# Altium PCB DCCController.PcbDoc
Units mil, origin at the board's own origin, x right, y up, seen from the top; angles counter-clockwise.
Board outline 6000 x 4000 mil, 2 copper layers (Top Layer, Bottom Layer); 53 components, 75 nets, 242 pads, 18 vias.
Unrouted connection lines stored in the file: 1.
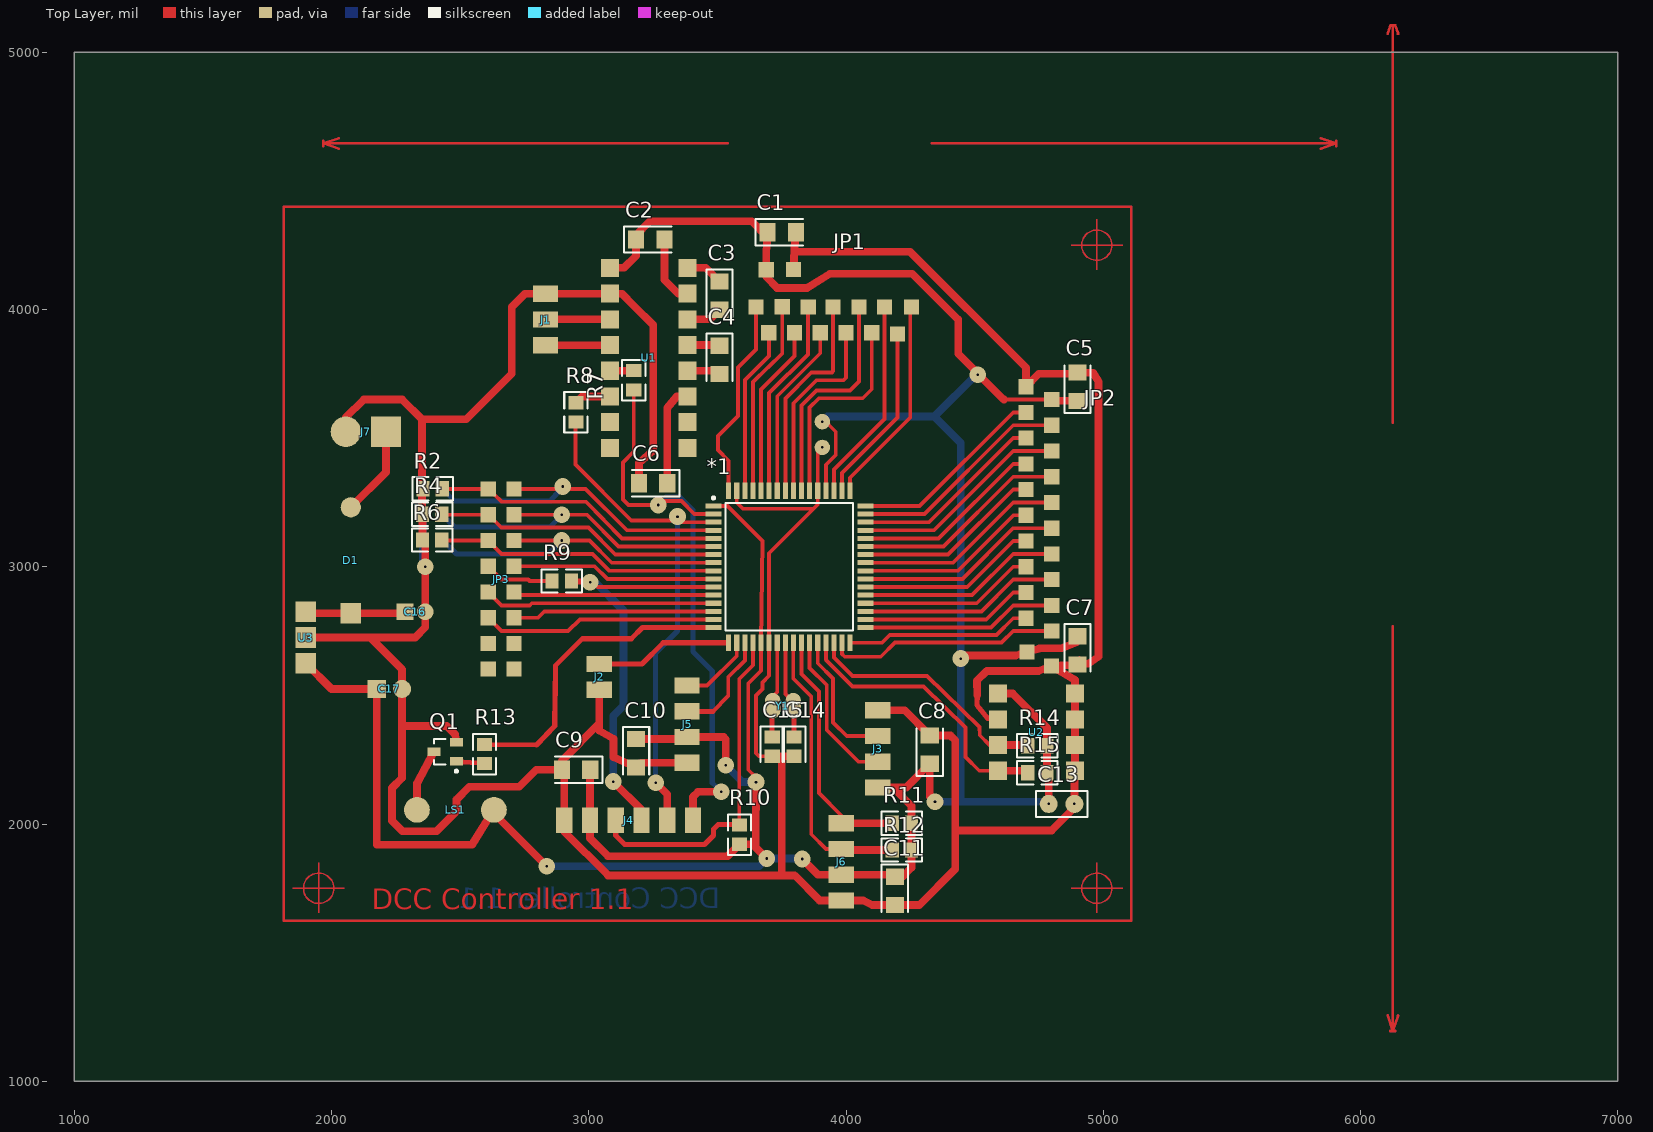
[diagram p0: Top Layer view]
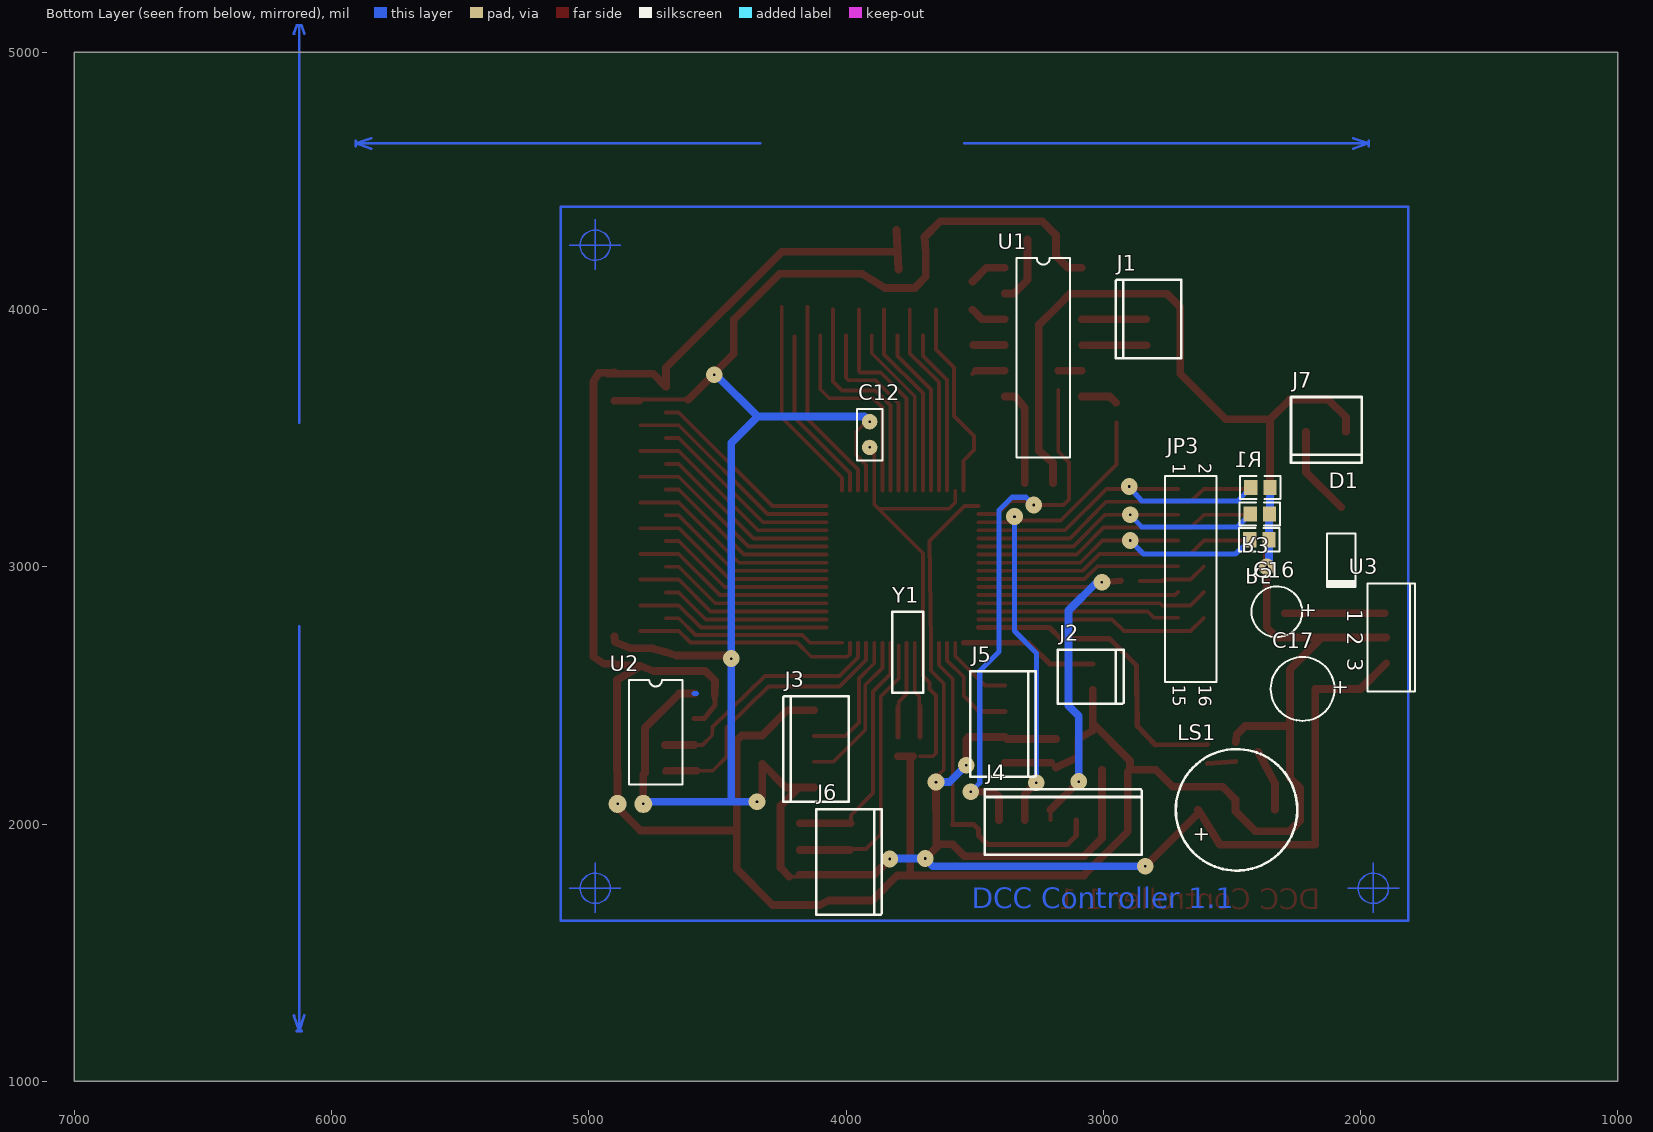
[diagram p1: Bottom Layer view, seen from below]

## Layer stack, top to bottom
Top Layer: signal copper 1.4
Dielectric: dielectric 12.6, FR-4, Dk 4.8
Bottom Layer: signal copper 1.4

## Board outline
1000,1000 7000,1000 7000,5000 1000,5000

## Design rules (kind name [scope] priority, off if disabled: settings)
Clearance [All] p1: gap=10
ComponentClearance [All] p1: gap=10 collisioncheckmode=0
PolygonConnect [All] p1: connectstyle=Relief reliefconductorwidth=10 reliefentries=4 polygonreliefangle="90 Angle"
RoutingLayers [All] p1: top layer=Horizontal bottom layer=Vertical
RoutingVias [All] p1: holewidth=28 width=50 viastyle="Through Hole" minholewidth=28 minwidth=50 maxholewidth=28 maxwidth=50
SolderMaskExpansion [All] p1: expansion=4
TestPointUsage [All] p1: valid=0 allowmultiple=FALSE
Testpoint [All] p1: side=15 testpointundercomponent=TRUE minsize=40 maxsize=100 preferedsize=60 minholesize=0 maxholesize=40 preferedholesize=32 testpointgrid=1 style=1023 order=-539222988
Width [All] p1: maxlimit=50 minlimit=10 preferedwidth=20 toplayer_prefwidth=30 bottomlayer_prefwidth=30 minimp=50.000000 maximp=50.000000 favimp=50.000000
16 further rules are at their usual default settings.

## Classes and differential pairs
component class DCCController: *1 C1 C2 C3 C4 C5 C6 C7 C8 C9 C10 C11 C12 C13 C14 C15 C16 C17 D1 J1 J2 J3 J4 J5 J6 J7 JP1 JP2 JP3 LS1 Q1 R1 R2 R3 R4 R5 R6 R7 R8 R9 R10 R11 R12 R13 R14 R15 U1 U2 U3 Y1

## Components (designator, comment, footprint, x,y, rotation, side; value= is the part's Value field where it differs from the comment)
*1 "Atmega128" 64A 3780,3000 r0 top
C1 "Cap Pol1" CC3216-1206 3750,4300 r0 top
C2 "Cap Pol1" CC3216-1206 3239,4272 r0 top
C3 "Cap Pol1" CC3216-1206 3508,4054 r270 top
C4 "Cap Pol1" CC3216-1206 3508,3804 r270 top
C5 "Cap Pol1" CC3216-1206 4900,3700 r90 top
C6 "Cap Pol1" CC3216-1206 3250,3325 r180 top
C7 "Cap Pol1" CC3216-1206 4900,2675 r270 top
C8 "Cap Pol1" CC3216-1206 4326,2289 r90 top
C9 "Cap Pol1" CC3216-1206 2951,2211 r180 top
C10 "Cap Pol1" CC3216-1206 3184,2275 r270 top
C11 "Cap Pol1" CC3216-1206 4190,1740 r270 top
C12 "Cap" RAD-0.1#1 3908,3514 r270 bottom
C13 "Cap" RAD-0.1#2 4838,2078 r0 top
C14 "Cap" CC2012-0805 3798,2301 r270 top
C15 "Cap" CC2012-0805 3713,2301 r270 top
C16 "Cap Pol1" CAPPR2-5X11 2325,2825 r0 bottom
C17 "Cap Pol1" CAPPR2.5-6.3X11.5 2225,2525 r0 bottom
D1 "Diode 1N4001" DIO10.46-5.3x2.8 2075,3025 r270 bottom
J1 "RS232" "0.1 SIP 3 PIN" 2732,3861 r180 bottom
J2 "DCCOut" "0.1 SIP 2 PIN" 3141,2722 r0 bottom
J3 "LCD" "0.1 SIP 4 PIN" 4024,2242 r180 bottom
J4 "ISP" "0.1 SIP 6 PIN" 3105,1915 r270 bottom
J5 "Throttle Quadrature" "0.1 SIP 4 PIN" 3482,2438 r0 bottom
J6 "External CABs" "0.1 SIP 4 PIN" 4081,1903 r0 bottom
J7 "SIP2 CONNECTOR" "0.156 SIP 2 PIN" 1900,3625 r90 bottom
JP1 "Header 15" HDR1X15 3565,4700 r0 top
JP2 "Header 22" HDR1X22 5860,4200 r270 top
JP3 "Keypad" HDR2X8 2709,3302 r270 bottom
LS1 "Buzzer" "Mini PC Mount Piezo" 2631.21,2055 r180 bottom
Q1 "" SO-G3 2442,2281 r90 top
R1 "Res2" CR2012-0805 2389,3308 r180 bottom
R2 "Res2" CR2012-0805 2393,3303 r180 top
R3 "Res2" CR2012-0805 2391,3205 r180 bottom
R4 "Res2" CR2012-0805 2391,3204 r180 top
R5 "Res2" CR2012-0805 2393,3105 r180 bottom
R6 "Res2" CR2012-0805 2391,3104 r180 top
R7 "Res2" CR2012-0805 3175,3725 r270 top
R8 "Res2" CR2012-0805 2950,3600 r270 top
R9 "Res2" CR2012-0805 2895,2945 r0 top
R10 "Res2" CR2012-0805 3586,1959 r90 top
R11 "Res2" CR2012-0805 4217,2003 r0 top
R12 "Res2" CR2012-0805 4217,1899 r0 top
R13 "Res1" R2012-0805 2595,2272 r270 top
R14 "Res2" CR2012-0805 4744,2304 r180 top
R15 "Res2" CR2012-0805 4744,2199 r180 top
U1 "MAX232ACPE" PE16A 3233,3812 r270 bottom
U2 "24LC256" 8P3 4740,2357 r270 bottom
U3 "LM7805CT" T03B 1900,2725 r270 bottom
Y1 "XTAL" "Xtal Cylinder" 3760,2460 r180 bottom
? "" Crosshair 4975,4250 r270 top
? "" Crosshair 4975,1750 r270 top
? "" Crosshair 1950,1750 r270 top

## Footprints (in the part's own frame and the unit in brackets; to place one, negate y for a bottom-side part, rotate by r counter-clockwise, add the part's x,y. Pads: shape width x height; smd on the part's side, far side on the other; paste and mask are expansions set on the pad)
"0.1 SIP 2 PIN" [mm] "0.1 SIP 2 PIN"
  rect 2.5x1.6 smd far side: 1(-2.54,5.08) 2(-2.54,2.54)
  silkscreen extent -5.59,1.14 0.89,6.48
"0.1 SIP 3 PIN" [mm] "0.1 SIP 3 PIN"
  rect 2.5x1.6 smd far side: 1(-2.54,5.08) 2(-2.54,2.54) 3(-2.54,0)
  silkscreen extent -5.59,-1.27 0.89,6.48
"0.1 SIP 4 PIN" [mm] "0.1 SIP 4 PIN"
  rect 2.5x1.6 smd far side: 1(-2.54,5.08) 2(-2.54,2.54) 3(-2.54,0) 4(-2.54,-2.54)
  silkscreen extent -5.59,-3.94 0.89,6.48
"0.1 SIP 6 PIN" [mm] "0.1 SIP 6 PIN"
  rect 2.5x1.6 smd far side: 1(-2.54,5.08) 2(-2.54,2.54) 3(-2.54,0) 4(-2.54,-2.54) 5(-2.54,-5.08) 6(-2.54,-7.62)
  silkscreen extent -5.59,-9.02 0.89,6.48
"0.156 SIP 2 PIN" [mm]
  rect 3x3 smd far side: 1(-2.54,7.92)
  round 3 smd far side: 2(-2.54,3.96)
  silkscreen extent -5.59,2.41 0.89,9.4
8P3 [mil] "DIP; 8 Leads; Row Spacing 7.62 mm; Pitch 2.54 mm"
  rect 70x70 smd far side: 1(-150,-150) 2(-50,-150) 3(50,-150) 4(150,-150) 5(150,150) 6(50,150) 7(-50,150) 8(-150,150)
  silkscreen extent -203,-104 203,104
64A [mm] "QFP; 64 Leads; Body 14 x 14 mm; Pitch 0.8 mm"
  rect 1.6x0.5 smd: 1(-7.5,6) 2(-7.5,5.2) 3(-7.5,4.4) 4(-7.5,3.6) 5(-7.5,2.8) 6(-7.5,2) 7(-7.5,1.2) 8(-7.5,0.4) 9(-7.5,-0.4) 10(-7.5,-1.2) 11(-7.5,-2) 12(-7.5,-2.8) 13(-7.5,-3.6) 14(-7.5,-4.4) 15(-7.5,-5.2) 16(-7.5,-6) 33(7.5,-6) 34(7.5,-5.2) 35(7.5,-4.4) 36(7.5,-3.6) 37(7.5,-2.8) 38(7.5,-2) 39(7.5,-1.2) 40(7.5,-0.4) 41(7.5,0.4) 42(7.5,1.2) 43(7.5,2) 44(7.5,2.8) 45(7.5,3.6) 46(7.5,4.4) 47(7.5,5.2) 48(7.5,6)
  rect 0.5x1.6 smd: 17(-6,-7.5) 18(-5.2,-7.5) 19(-4.4,-7.5) 20(-3.6,-7.5) 21(-2.8,-7.5) 22(-2,-7.5) 23(-1.2,-7.5) 24(-0.4,-7.5) 25(0.4,-7.5) 26(1.2,-7.5) 27(2,-7.5) 28(2.8,-7.5) 29(3.6,-7.5) 30(4.4,-7.5) 31(5.2,-7.5) 32(6,-7.5) 49(6,7.5) 50(5.2,7.5) 51(4.4,7.5) 52(3.6,7.5) 53(2.8,7.5) 54(2,7.5) 55(1.2,7.5) 56(0.4,7.5) 57(-0.4,7.5) 58(-1.2,7.5) 59(-2,7.5) 60(-2.8,7.5) 61(-3.6,7.5) 62(-4.4,7.5) 63(-5.2,7.5) 64(-6,7.5)
  silkscreen extent -7.62,-6.3 6.3,6.92
CAPPR2-5X11 [mil]
  rect 65x65 smd far side: 1(-39.37,0)
  round 65 smd far side: 2(39.37,0)
  silkscreen extent -98,-98 98,98
CAPPR2.5-6.3X11.5 [mil]
  rect 70x70 smd far side: 1(-49.21,0)
  round 70 smd far side: 2(49.21,0)
  silkscreen extent -124,-124 124,124
CC2012-0805 [mm]
  rect 1.3x1.5 smd: 1(-0.95,0) 2(0.95,0)
  silkscreen extent -2,-1.15 1.5,1.15
CC3216-1206 [mm]
  rect 1.6x1.8 smd: 1(-1.4,0) 2(1.4,0)
  silkscreen extent -2.6,-1.3 2.1,1.3
CR2012-0805 [mm]
  rect 1.3x1.5 smd: 1(-0.95,0) 2(0.95,0)
  silkscreen extent -2,-1.15 2,1.15
Crosshair [mil] "Mounting Hole pad"
  Multi-Layer circle w5: c0,0 r59.06
  Multi-Layer lines w5: 0,-100 0,100 ; 95,0 -100,0
DIO10.46-5.3x2.8 [mm]
  round 2 smd far side: 1(-5.23,0)
  rect 2x2 smd far side: 2(5.23,0)
  silkscreen extent -2.65,-1.4 2.75,1.4
HDR1X15 [mil] "Connector; Header; 15 Position"
  rect 59.06x59.06 smd: 1(231,-544) 2(125,-545) 3(85,-690) 4(135,-790) 5(187,-689) 6(235,-790) 7(288,-690) 8(335,-790) 9(385,-690) 10(435,-790) 11(485,-690) 12(535,-790) 13(585,-690) 14(635,-795) 15(690,-690)
HDR1X22 [mil] "Connector; Header; 22 Position"
  rect 59.06x59.06 smd: 1(500,-1160) 2(550,-1060) 3(600,-1160) 4(650,-1060) 5(700,-1160) 6(750,-1060) 7(800,-1160) 8(850,-1060) 9(900,-1160) 10(950,-1060) 11(1000,-1160) 12(1050,-1060) 13(1100,-1160) 14(1150,-1060) 15(1200,-1160) 16(1250,-1060) 17(1300,-1160) 18(1350,-1060) 19(1400,-1160) 20(1450,-1060) 21(1531,-1156) 22(1586,-1061)
HDR2X8 [mm] "Connector; Header; 8x2 Position"
  rect 1.5x1.5 smd far side: 1(0,0) 2(0,2.54) 3(2.54,0) 4(2.54,2.54) 5(5.08,0) 6(5.08,2.54) 7(7.62,0) 8(7.62,2.54) 9(10.16,0) 10(10.16,2.54) 11(12.7,0) 12(12.7,2.54) 13(15.24,0) 14(15.24,2.54) 15(17.78,0) 16(17.78,2.54)
  silkscreen extent -1.27,-1.27 19.05,3.81
"Mini PC Mount Piezo" [mil]
  round 100 smd far side: 1(0,0) 2(299.21,0)
  silkscreen extent -87,-236 386,236
PE16A [mil] "DIP; 16 Leads; Row Spacing 7.62 mm; Pitch 2.54 mm"
  rect 70x70 smd far side: 1(-350,-150) 2(-250,-150) 3(-150,-150) 4(-50,-150) 5(50,-150) 6(150,-150) 7(250,-150) 8(350,-150) 9(350,150) 10(250,150) 11(150,150) 12(50,150) 13(-50,150) 14(-150,150) 15(-250,150) 16(-350,150)
  silkscreen extent -388,-104 388,104
R2012-0805 [mm]
  rect 1.3x1.5 smd: 1(-0.95,0) 2(0.95,0)
  silkscreen extent -2,-1.15 2,1.15
RAD-0.1#1 [mil]
  round 60 hole 10: 1(-50,0) 2(50,0)
  silkscreen extent -100,-50 100,50
RAD-0.1#2 [mil]
  round 70 hole 10: 1(-50,0) 2(50,0)
  silkscreen extent -100,-50 100,50
SO-G3 [mm]
  rect 0.85x1.3 smd: 1(-0.95,-1.1) 2(0.95,-1.1) 3(0,1.1)
  silkscreen extent -2.05,-1.22 1.28,1.1
T03B [mil] "TO, Thru-Hole, Vertical, Heatsink Mounted; 3 In-Line Leads; Pitch 2.54 mm"
  rect 80x80 smd far side: 1(-100,0) 2(0,0) 3(100,0)
  silkscreen extent -211,-73 211,112
"Xtal Cylinder" [mil]
  oval 60x99.37 smd far side: 1(-35,0) 2(45,0)
  silkscreen extent -60,50 60,365

## Part data
C1 C2 C3 C4 C5 C6 C7 C8 C9 C10 C11 C16 C17: "Polarized Capacitor (Radial)"
C12 C13 C14 C15: "Capacitor"
D1: "1 Amp General Purpose Rectifier"
J1: library part "SIP3 CONNECTOR"
J2: library part "SIP2 CONNECTOR"
J3 J5 J6: library part "SIP4 CONNECTOR"
J4: library part "SIP6 CONNECTOR"
JP1: "Header, 15-Pin"
JP2: "Header, 22-Pin"
JP3: library part "Header 8X2", "Header, 8-Pin, Dual row"
LS1: "Magnetic Transducer Buzzer"
Q1: library part MMBT100A, "General Purpose Amplifier NPN Silicon"
R1 R2 R3 R4 R5 R6 R7 R8 R9 R10 R11 R12 R13 R14 R15: "Resistor"
U1: "+5V Powered, Multi-Channel RS-232 Driver/Receiver"
U3: "Series 3-Terminal Positive Regulator"
Y1: "Crystal Oscillator"

## Via types
v1: diameter 65, hole 10, Top Layer to Bottom Layer, 18 vias

## Nets (pads, with @x,y where several pads share a name; then routed paths per layer and width w, separated by ;. In a path a pad name is that pad's centre, name@x,y a point inside that pad or via, vN(x,y) a via of type N, cw(c..) or ccw(c..) an arc to the next point about the centre after c; other vN are vias at no path point)
GND: *1.22 *1.53 *1.63 C1.2 C5.2 C6.2 C7.2 C8.2 C9.2 C10.2 C11.2 C12.2 C13.2 C14.2 C15.2 C16.2 C17.2 J1.1 J2.1 J3.1 J4.1 J5.1 J6.1 J7.2 JP1.1 JP2.1 JP2.22 Q1.2 R1.2 R2.2 R3.2 R4.2 R5.2 R6.2 U1.15 U2.1 U2.2 U2.3 U2.4 U2.7 U3.2 | length 16317.3
  Top Layer w15: R6.2 R6.2@2364.37,3093.23 ; C9.2 C9.2@2905,2201.88 ; U1.15@3082,4061 U1.15 ; C10.2 C10.2@3202.12,2238 ; *1.63 3575.28,3250.28 3600,3225.55 3874.45,3225.55 ; C15.2 3661.4,2263.6 3650,2275 3650,2500 3675,2525 3675,2550 3701.26,2576.26 3701.26,3052.36 3890.24,3241.34 3890.24,3460.24 C12.2@3905,3475 ; C15.2@3738.6,2263.6 3750,2263.6 ; C1.2@3804,4309 3805.12,4225 ; U2.7 U2.7@4590,2410 ; U2.4@4888,2205 U2.4 ; C7.2 C7.2@4907,2645.88
  Top Layer w20: 4510,2501 4509,2462 4551,2410 U2.7@4590,2410
  Top Layer w30: U3.2 2325,2725 2364.37,2764.37 R6.2@2364.37,3093.23 ; J7.2 2055.91,3580.91 2125,3650 2275,3650 2351.6,3573.4 ; 2150,2725 2274.21,2600.79 2274.21,2179.21 2235,2140 2235,2013 2276,1972 2408,1972 2486,2050 2486,2095 2536,2145 2730,2145 2796,2211 C9.2 2895.88,2245.88 3041,2391 ; 2274.21,2381 2448,2381 2481,2348 Q1.2 ; R4.2@2351.6,3206 2351.6,3573.4 ; R6.2 R4.2 ; C9.2@2905,2201.88 2905,1970 3075,1800 3800,1800 3897,1703 J6.1 4067,1703 4102,1685 C11.2 4284.88,1684.88 4425,1825 4425,2325 4405.88,2344.12 C8.2 4228.12,2442 J3.1 ; J2.1 3041,2362.88 3096,2331 3096,2260 C10.2 ; C6.2 3195,3404 3251,3452 3251,3940 3174.88,4015.12 3129,4061 J1.1 2752,4061 2701,4010 2701,3751 2523.4,3573.4 2351.6,3573.4 ; C10.2@3202.12,2238 J5.1 ; C15.2@3738.6,2263.6 C14.2 ; 3750,1800 3750,2263.6 ; JP1.1 C1.2@3804,4309 ; 3805.12,4225 4249,4225 4700,3774 JP2.1 4750,3750 C5.2@4925,3750 ; 4425,1975 4800,1975 4888,2063 U2.4@4888,2205 ; 4510,2501 4509,2557 4548,2595 4748,2595 JP2.22 ; U2.4 4890,2560 JP2.22 ; C7.2 JP2.22 ; C5.2 4960,3754 4982,3719 4982,2651 4941.88,2622.88 C7.2@4901,2622.88
  Bottom Layer w20: v1@2355.6,3008.77 v1(2364.37,3000)
  Bottom Layer w30: R3.2@2351.6,3207 R1.2 ; v1@2355.6,3008.77 R3.2@2355.6,3203
Net*1_2: *1.2 J4.6 R7.2 | length 2347.9
  Top Layer w15: R7.2 3175,3448 3133,3406 3133,3262 3155,3240 v1(3270,3240) 3285,3255 3360,3255 3410.28,3204.72 *1.2
  Top Layer w30: J4.6 3405,2105 3425,2125 v1(3515,2125)
  Bottom Layer w20: v1(3270,3240) 3300,3270 3355,3270 3405,3220 3405,2670 3480,2595 3480,2160 v1(3515,2125)
Net*1_3: *1.3 J4.5 R8.2 | length 2039
  Top Layer w15: R8.2@2948,3560.6 2948,3398 3165,3180 3330,3180 v1(3345,3195) 3366.77,3173.23 *1.3
  Top Layer w30: v1(3260,2160) 3305,2115 J4.5
  Bottom Layer w20: v1(3260,2160) 3260,2665 3345,2750 v1(3345,3195)
Net*1_4: *1.4 JP3.1 R1.1 | length 1362.8
  Top Layer w15: JP3.1 2988,3302 3148.27,3141.73 *1.4
  Bottom Layer w20: R1.1 2479.4,3255 2850,3255 v1(2899,3312)
Net*1_5: *1.5 JP3.2 R2.1 | length 1132.8
  Top Layer w15: R2.1@2431.4,3302 JP3.2 2661,3253 2990,3253 3129.76,3110.24 *1.5
Net*1_6: *1.6 JP3.3 R3.1 | length 1334.2
  Top Layer w15: JP3.3 2993,3202 3116.26,3078.74 *1.6
  Bottom Layer w20: R3.1 2478.4,3155 2850,3155 v1(2895,3202)
Net*1_7: *1.7 JP3.4 R4.1 | length 1118.4
  Top Layer w15: R4.1@2430.4,3202 JP3.4 2660,3152 2999,3152 3102.76,3047.24 *1.7
Net*1_8: *1.8 JP3.5 R5.1 | length 1320.4
  Top Layer w15: JP3.5 3003,3102 3089.25,3015.75 *1.8
  Bottom Layer w20: R5.1 2485.4,3050 2843,3050 v1(2895,3102)
Net*1_9: *1.9 JP3.6 R6.1 | length 1103.1
  Top Layer w15: R6.1@2430.4,3102 JP3.6 2661,3050 3015,3050 3080.75,2984.25 *1.9
Net*1_10: *1.10 JP3.7 | length 796.1
  Top Layer w15: JP3.7 3023,3002 3072.24,2952.76 *1.10
Net*1_11: *1.11 J4.4 R9.2 | length 1617.6
  Top Layer w15: v1@3000,2945 v1(3005,2940) 3036,2921 *1.11 ; J4.4 J4.4@3205,2055
  Top Layer w25: R9.2 v1(3005,2940)
  Top Layer w30: v1(3095,2165) J4.4@3205,2055
  Bottom Layer w20: v1(3005,2940) v1@3025,2940
  Bottom Layer w30: v1@3025,2940 3135,2830 3135,2460 3095,2420 v1(3095,2165)
Net*1_12: *1.12 JP3.9 | length 780.8
  Top Layer w15: JP3.9 2721.24,2889.76 *1.12
Net*1_13: *1.13 JP3.10 | length 900.7
  Top Layer w15: JP3.10 2661,2850 2770,2850 2778.27,2858.27 *1.13
Net*1_14: *1.14 JP3.11 | length 786
  Top Layer w15: JP3.11 2802,2802 2826.77,2826.77 *1.14
Net*1_15: *1.15 JP3.12 | length 916
  Top Layer w15: JP3.12 2661,2750 2920,2750 2965.28,2795.28 *1.15
Net*1_16: *1.16 R13.1 | length 1214.9
  Top Layer w20: R13.1 2797,2307 2868,2381 2870,2615 2975,2720 3165,2720 3208.78,2763.78 *1.16
Net*1_17: *1.17 J2.2 | length 537
  Top Layer w20: J2.2 3207,2622 3289.72,2704.72 *1.17
Net*1_18: *1.18 J5.4 | length 292.5
  Top Layer w15: J5.4 3460,2538 3575.28,2653.28 *1.18
Net*1_19: *1.19 J5.3 | length 419
  Top Layer w15: 3483,2438 3542,2497 3542,2570.46 3606.77,2635.23 *1.19
  Top Layer w20: J5.3 3483,2438
Net*1_20: *1.20 J4.3 R10.2 | length 1330.6
  Top Layer w15: R10.2@3585,1997.4 3585,2480 3585,2564 3638.27,2617.27 *1.20
  Top Layer w20: J4.3 3105,1955 3140,1920 3450,1920 3485,1955 3485,1980 3502.4,1997.4 R10.2@3585,1997.4
Net*1_23: *1.23 C15.1 Y1.2 | length 371.7
  Top Layer w15: Y1.2 3715,2495 3732.76,2512.76 *1.23
  Top Layer w20: C15.1 Y1.2@3713,2458
Net*1_24: *1.24 C14.1 Y1.1 | length 376.1
  Top Layer w15: *1.24 3764.25,2505.75 3795,2475 Y1.1
  Top Layer w20: C14.1 Y1.1@3798,2457
Net*1_25: *1.25 J6.3 R12.1 | length 1098.2
  Top Layer w15: *1.25@3795,2695 3795,2565 3865,2495 3865,1960 3922,1903 J6.3
  Top Layer w30: J6.3@3985,1899 R12.1
Net*1_26: *1.26 J6.4 R11.1 | length 964
  Top Layer w15: *1.26 3827.24,2582.76 3895,2515 3895,2120 3981,2034 J6.4
  Top Layer w30: J6.4 R11.1
Net*1_27: *1.27 J3.3 | length 617.1
  Top Layer w15: *1.27 3858.74,2606.26 3925,2540 3925,2365 4048,2242 J3.3
Net*1_28: *1.28 J3.2 | length 530.4
  Top Layer w15: *1.28 3890.24,2624.76 3950,2565 3950,2395 4003,2342 J3.2
Net*1_29: *1.29 R15.2 U2.5 | length 1098.8
  Top Layer w15: *1.29 3921.73,2638.27 4025,2535 4301,2535 4464,2375 4465,2260 4518,2207 U2.5@4581,2207 ; R15.2@4698.6,2207 R15.2
  Top Layer w30: U2.5@4581,2207 R15.2@4698.6,2207
Net*1_30: *1.30 R14.2 U2.6 | length 969.3
  Top Layer w15: *1.30 3953.23,2646.77 4025,2575 4315,2575 4519,2377 4520,2345 4558,2307 U2.6 ; R14.2@4703.6,2307 R14.2
  Top Layer w30: U2.6 R14.2@4703.6,2307
Net*1_31: *1.31 JP2.20 | length 905.4
  Top Layer w15: *1.31 3984.72,2660.28 3995,2650 4135,2650 4190,2705 4605,2705 4650,2750 JP2.20
Net*1_32: *1.32 JP2.19 | length 723.2
  Top Layer w15: *1.32 4139.72,2704.72 4170,2735 4585,2735 4650,2800 JP2.19
Net*1_33: *1.33 JP2.18 | length 760.4
  Top Layer w15: *1.33 4563.78,2763.78 4650,2850 JP2.18
Net*1_34: *1.34 JP2.17 | length 668.1
  Top Layer w15: *1.34 4545.28,2795.28 4650,2900 JP2.17
Net*1_35: *1.35 JP2.16 | length 775.8
  Top Layer w15: *1.35 4526.77,2826.77 4650,2950 JP2.16
Net*1_36: *1.36 JP2.15 | length 683.4
  Top Layer w15: *1.36 4508.27,2858.27 4650,3000 JP2.15
Net*1_37: *1.37 JP2.14 | length 791.1
  Top Layer w15: *1.37 4489.76,2889.76 4650,3050 JP2.14
Net*1_38: *1.38 JP2.13 | length 698.8
  Top Layer w15: *1.38 4471.26,2921.26 4650,3100 JP2.13
Net*1_39: *1.39 JP2.12 | length 806.4
  Top Layer w15: *1.39 4452.76,2952.76 4650,3150 JP2.12
Net*1_40: *1.40 JP2.11 | length 714.1
  Top Layer w15: *1.40 4434.25,2984.25 4650,3200 JP2.11
Net*1_41: *1.41 JP2.10 | length 821.8
  Top Layer w15: *1.41 4415.75,3015.75 4650,3250 JP2.10
Net*1_42: *1.42 JP2.9 | length 729.4
  Top Layer w15: *1.42 4397.24,3047.24 4650,3300 JP2.9
Net*1_43: *1.43 JP2.8 | length 837.1
  Top Layer w15: *1.43 4378.74,3078.74 4650,3350 JP2.8
Net*1_44: *1.44 JP2.7 | length 744.7
  Top Layer w15: *1.44 4360.24,3110.24 4650,3400 JP2.7
Net*1_45: *1.45 JP2.6 | length 852.4
  Top Layer w15: *1.45 4341.73,3141.73 4650,3450 JP2.6
Net*1_46: *1.46 JP2.5 | length 760.1
  Top Layer w15: *1.46 4323.23,3173.23 4650,3500 JP2.5
Net*1_47: *1.47 JP2.4 | length 867.7
  Top Layer w15: *1.47 4304.72,3204.72 4650,3550 JP2.4
Net*1_48: *1.48 JP2.3 | length 775.4
  Top Layer w15: *1.48 4286.22,3236.22 4650,3600 JP2.3
Net*1_49: *1.49 JP1.15 | length 811.6
  Top Layer w15: *1.49 4016.22,3346.22 4250,3580 JP1.15@4250,4010
Net*1_50: *1.50 JP1.14 | length 688.9
  Top Layer w15: *1.50 3984.72,3364.72 4200,3580 JP1.14@4200,3895
Net*1_51: *1.51 JP1.13 | length 796.2
  Top Layer w15: *1.51 3953.23,3378.23 4150,3575 JP1.13
Net*1_54: *1.54 JP1.12 | length 804.2
  Top Layer w15: *1.54 3858.74,3618.74 3895,3655 4065,3655 4100,3690 JP1.12@4100,3900
Net*1_55: *1.55 JP1.11 | length 873.1
  Top Layer w15: *1.55 3827.24,3627.24 3885,3685 4015,3685 4050,3720 JP1.11@4050,4000
Net*1_56: *1.56 JP1.10 | length 750.8
  Top Layer w15: *1.56 3795.75,3635.75 3885,3725 3990,3725 4000,3735 JP1.10@4000,3900
Net*1_57: *1.57 JP1.9 | length 828.5
  Top Layer w15: *1.57 3764.25,3654.25 3865,3755 3945,3755 3950,3760 JP1.9@3950,4000
Net*1_58: *1.58 JP1.8 | length 674
  Top Layer w15: *1.58 3732.76,3662.76 3900,3830 JP1.8@3900,3900
Net*1_59: *1.59 JP1.7 | length 768.2
  Top Layer w15: *1.59 3701.26,3676.26 3852,3825 3852,3999 JP1.7@3853,4000
Net*1_60: *1.60 JP1.6 | length 658.7
  Top Layer w15: *1.60 3669.76,3689.76 3800,3820 JP1.6@3800,3900
Net*1_61: *1.61 JP1.5 | length 753.7
  Top Layer w15: *1.61 3638.27,3718.27 3752,3829 JP1.5@3752,4001
Net*1_62: *1.62 JP1.4 | length 643.3
  Top Layer w15: *1.62 3606.77,3726.77 3700,3820 JP1.4@3700,3900
Net*1_64: *1.64 JP1.3 | length 783.3
  Top Layer w15: *1.64 3543.78,3412.22 3502,3454 3502,3508 3580,3586 3580,3775 3650,3845 JP1.3@3650,4000
NetC2_2: C2.2 U1.2 | length 267.3
  Top Layer w30: C2.2 3294.12,4115.88 3348,4062 U1.2
NetC3_1: C3.1 U1.1 | length 146.9
  Top Layer w30: U1.1 3455.12,4162 C3.1
NetC3_2: C3.2 U1.3 | length 140.3
  Top Layer w30: U1.3 3471.12,3962 C3.2
NetC4_1: C4.1 U1.4 | length 126.2
  Top Layer w15: C4.1@3505.12,3862 C4.1
  Top Layer w30: U1.4 C4.1@3505.12,3862
NetC4_2: C4.2 U1.5 | length 130.4
  Top Layer w15: C4.2@3494.88,3762 C4.2
  Top Layer w30: U1.5 C4.2@3494.88,3762
NetC6_1: C6.1 U1.6 | length 391.3
  Top Layer w30: C6.1 3305,3617 3342,3662 U1.6
NetC16_1: C16.1 D1.2 U3.1 | length 404.9
  Top Layer w15: U3.1 U3.1@1905.91,2819.09 ; C16.1@2294.09,2819.09 C16.1@2300,2825
  Top Layer w30: U3.1@1905.91,2819.09 C16.1@2294.09,2819.09
NetJ1_2: J1.2 U1.14 | length 251.4
  Top Layer w15: J1.2 J1.2@2833,3962
  Top Layer w30: J1.2@2833,3962 U1.14
NetJ1_3: J1.3 U1.13 | length 251.4
  Top Layer w15: U1.13@3082,3861 U1.13
  Top Layer w30: J1.3 U1.13@3082,3861
NetJP3_8: JP3.8 R9.1 | length 272.2
  Top Layer w15: JP3.8 2661,2950 2765,2950 2770,2945 R9.1
NetLS1_2: LS1.2 Q1.3 | length 243
  Top Layer w30: LS1.2 2332,2158.31 Q1.3
NetQ1_1: Q1.1 R13.2 | length 110.1
  Top Layer w20: Q1.1 R13.2
NetR7_1: R7.1 U1.12 | length 91.6
  Top Layer w30: U1.12 R7.1@3174.6,3762
NetR8_1: R8.1 U1.11 | length 143.2
  Top Layer w30: R8.1 2974.6,3662 U1.11
VCC: *1.1 *1.21 *1.52 C1.1 C2.1 C5.1 C7.1 C8.1 C9.1 C10.1 C11.1 C12.1 C13.1 C17.1 J3.4 J4.2 J5.2 J6.2 JP1.2 JP2.2 JP2.21 LS1.1 R10.1 R11.2 R12.2 R14.1 R15.1 U1.16 U2.8 U3.3 | length 13560.6
  Top Layer w15: LS1.1@2631.21,2041.79 LS1.1 ; C9.1@3005,2209.88 C9.1 ; J5.2@3374.12,2330.12 J5.2 ; *1.1 3538.78,3236.22 3675,3100 *1.21 3669.76,2595.76 3620,2546 3620,2211 v1@3650,2181 ; C12.1@3910,3575 3960,3525 3960,3435 3921.73,3396.73 *1.52 ; C11.1@4182.12,1803 C11.1 C11.1@4220.12,1795.12 ; 4614,3650 JP2.2 JP2.2@4805.12,3644.88 ; C13.1@4782,2084 C13.1
  Top Layer w30: U3.3 2000,2525 C17.1 2176,1919 2546.21,1919 LS1.1 ; LS1.1@2631.21,2041.79 v1(2837,1836) ; C9.1@3005,2209.88 3005,1945 3075,1875 3539.4,1875 R10.1 3636.4,1921.6 v1(3692,1866) ; U1.16 3137,4162 3183.88,4208.88 3183.88,4289.88 3237,4343 3634,4343 3694.88,4282.12 3690,4223.88 3690,4128 3732,4084 3848,4084 3938,4139 4258,4139 4436,3961 4436,3828 4614,3650 ; C10.1 J5.2@3374.12,2330.12 ; J5.2 3525,2338 3533,2330 v1(3533,2228) ; R10.1@3601.6,1921.6 3649,1922 v1@3650,2181 ; v1(3830,1864) 3891,1803 C11.1@4182.12,1803 ; J3.4 4234.12,2142 C8.1 4326,2107 v1(4346,2087) ; 4183,2142 4254.4,2070.6 4254.4,1829.4 C11.1@4220.12,1795.12 ; v1(4446,2643) 4463,2655 4660,2655 JP2.21 4751,2682 4838,2683 4899,2708 C7.1 ; U2.8 4648,2507 4781.4,2373.6 R15.1 ; C13.1 R15.1@4788,2192.4 ; JP2.2@4805.12,3644.88 C5.1
  Bottom Layer w20: C12.1 C12.1@3928,3584 ; v1@4506,3747 v1(4512,3747) ; 4582,2507 4590,2507 ; C13.1@4779,2087 C13.1
  Bottom Layer w30: v1(2837,1836) 3662,1836 v1(3692,1866) v1@3830,1866 ; v1(3533,2228) 3598,2163 v1(3650,2163) ; C12.1@3928,3584 4343,3584 ; v1(4346,2087) C13.1@4779,2087 ; 4446,2088 4446,3481 4343,3584 ; v1@4506,3747 4343,3584
VDD: D1.1 J7.1 | length 350.8
  Top Layer w30: D1.1 2211.81,3367.72 J7.1
pads on no net: JP3.13 JP3.14 JP3.15 JP3.16 U1.7 U1.8 U1.9 U1.10

## Other copper
Top Layer:
  text "DCC Controller 1.1" at 2156,1669 h80
Bottom Layer:
  text "DCC Controller 1.1" at 3511,1672 h80
Multi-Layer:
  lines w10: 1968.5,4635.67 1968.5,4655.67 ; 2028.5,4625.67 1968.5,4645.67 ; 2028.5,4665.67 1968.5,4645.67 ; 3541.13,4645.67 1968.5,4645.67 ; 4332.88,4645.67 5905.51,4645.67 ; 5845.51,4625.67 5905.51,4645.67 ; 5845.51,4665.67 5905.51,4645.67 ; 5905.51,4635.67 5905.51,4655.67 ; 6106,1255.43 6126,1195.43 ; 6106,5072.44 6126,5132.44 ; 6116,1195.43 6136,1195.43 ; 6116,5132.44 6136,5132.44 ; 6126,2768.05 6126,1195.43 ; 6126,3559.81 6126,5132.44 ; 6146,1255.43 6126,1195.43 ; 6146,5072.44 6126,5132.44 ; 1815,1624 1815,4400 5109,4400 5109,1624 1815,1624
  text "3937.008 (mil)" at 3551.13,4609.68 h60
  text "3937.008 (mil)" at 6161.99,2778.05 h60 r90

## Text inside footprints (layer, text, board x,y; h text height)
C16: Bottom Overlay "+" at 2168.5,2854.53 h59.05 r180
C17: Bottom Overlay "+" at 2042.91,2554.53 h59.06 r180
JP3: Bottom Overlay "2" at 2629,3402 h50 r90; Bottom Overlay "1" at 2729,3402 h50 r90; Bottom Overlay "15" at 2729,2542 h50 r90; Bottom Overlay "16" at 2629,2542 h50 r90
LS1: Bottom Overlay "+" at 2651.21,1935 h60
U3: Bottom Overlay "2" at 2050.59,2744.68 h59.06 r90; Bottom Overlay "1" at 2050.59,2834.84 h59.06 r90; Bottom Overlay "3" at 2050.59,2644.68 h59.06 r90